# Altium PCB EBC.PcbDoc (part 1 of 2)
Units mil, origin at the board's own origin, x right, y up, seen from the top; angles counter-clockwise.
Board outline 3271.95 x 1972.47 mil, 2 copper layers (Top Layer, Bottom Layer), stack 12.8 mil thick; 145 components, 128 nets, 444 pads, 34 vias.
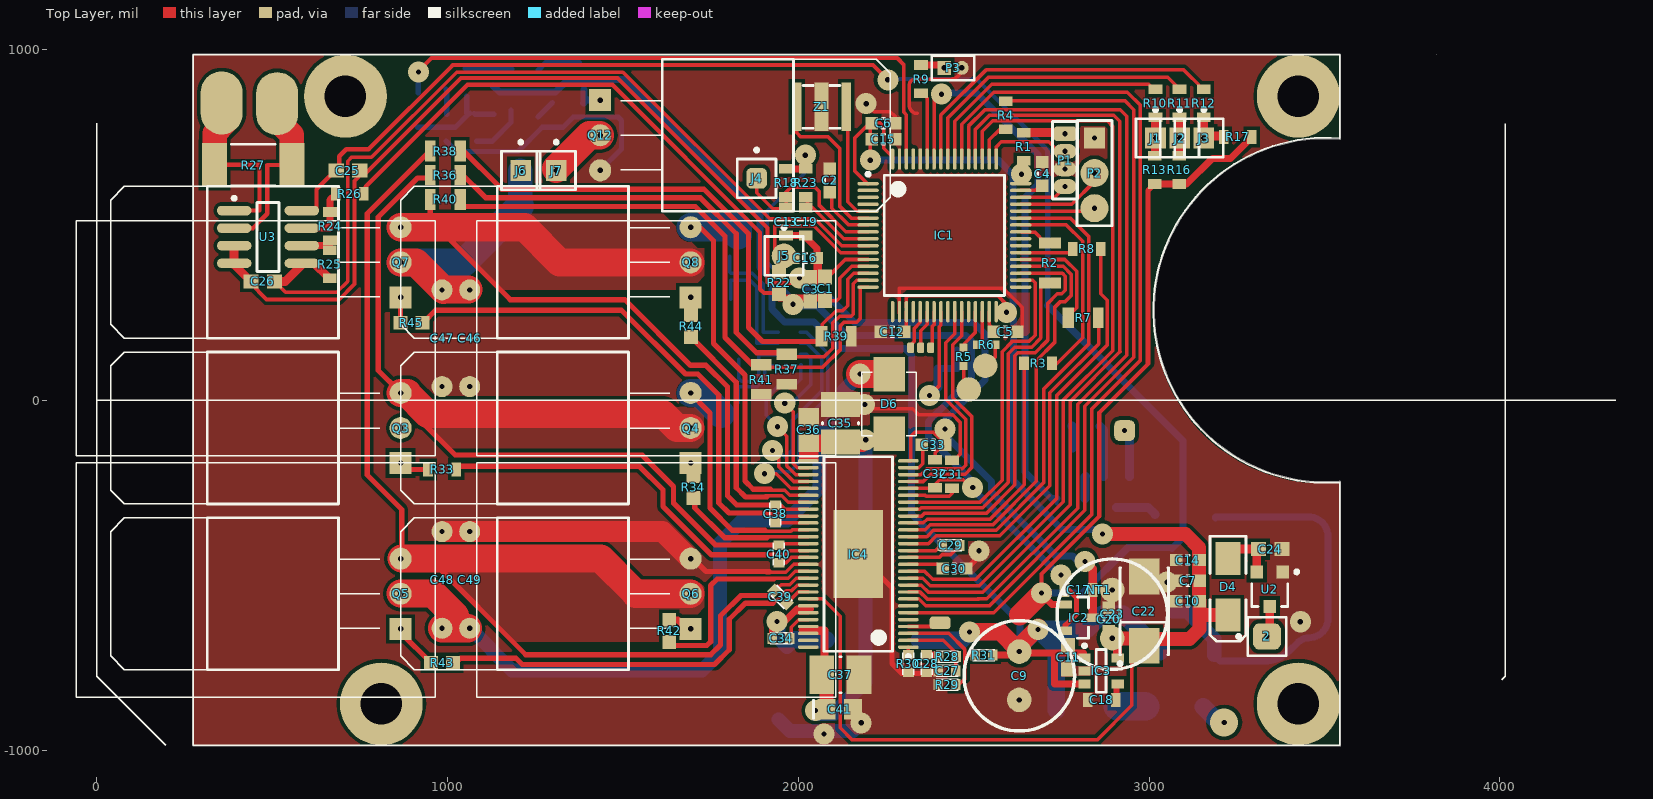
[diagram p0: Top Layer view]
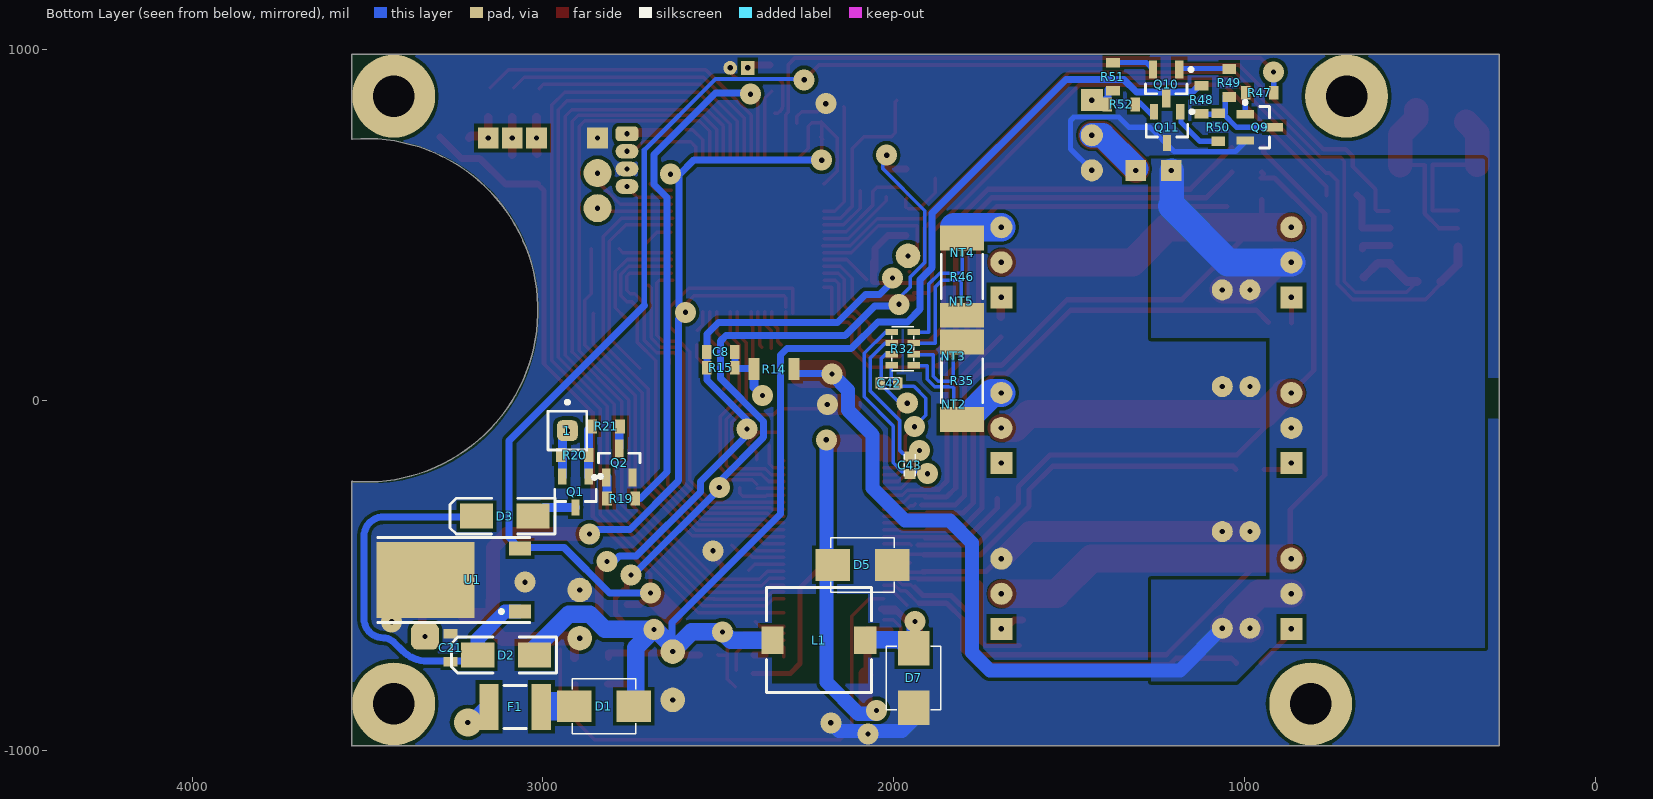
[diagram p1: Bottom Layer view, seen from below]

## Layer stack, top to bottom
Top Solder: solder mask 0.4, Solder Resist, Dk 3.5
Top Layer: signal copper 1.4
Dielectric1: core 10, FR-4, Dk 4.2
Bottom Layer: signal copper 1.4
Bottom Solder: solder mask 0.4, Solder Resist, Dk 3.5

## Board outline
273.61,-984.25 ccw(c275.59,-984.25) 275.59,-986.24 ccw(c275.59,-984.25) 275.59,-986.24 3543.31,-986.24 ccw(c3543.31,-984.25) 3545.29,-984.25 3545.29,-234 ccw(c3543.31,-234) 3542.35,-232.26 ccw(c3541.98,-234.75) 3541.79,-232.24 cw(c3503.94,255.91) 3542.84,743.97 ccw(c3543.04,746.48) 3545.55,746.48 ccw(c3543.04,746.48) 3545.29,747.59 3545.29,984 ccw(c3543.31,984) 3543.31,985.98 276.56,985.98 ccw(c275.59,984.25) 273.61,984.25

## Design rules (kind name [scope] priority, off if disabled: settings)
AssemblyTestPointUsage [All] p1 off:
AssemblyTestpoint [All] p1 off: testpointundercomponent=TRUE minsize=40 maxsize=100 preferedsize=60 minholesize=0 maxholesize=40 preferedholesize=32 testpointgrid=1 usegrid=TRUE gridtolerance=0.01 allowsidetop=TRUE allowsidebottom=TRUE
Clearance Clearance_Phases [InPolygon and InNetClass('Phases')] p1: gap=5 except(7: Arc-Poly Track-Poly SMDPad-Poly THPad-Poly Via-Poly Fill-Poly Poly-Poly)
Clearance "Clearance pads mounting" [(InNet('HOUSING_0') OR InNet('HOUSING_1') OR InNet('HOUSING_2')) AND IsPad] p2: gap=0.1
Clearance "Clearance main" [All] p3: gap=5.12 except(7.09: SMDPad-SMDPad SMDPad-THPad THPad-THPad; 8.27: SMDPad-Via THPad-Via Via-Via; 10.5: Arc-Poly Track-Poly SMDPad-Poly THPad-Poly Via-Poly Fill-Poly Poly-Poly)
ComponentClearance [All] p1 off: gap=10 collisioncheckmode=3 verticalgap=10 showdistances=FALSE
DiffPairsRouting [All] p1: maxlimit=10 minlimit=5 mostfreqgap=5 toplayer_minwidth=6 toplayer_maxwidth=25 toplayer_prefwidth=8 bottomlayer_minwidth=6 bottomlayer_maxwidth=25 bottomlayer_prefwidth=8 maxuncoupledlength=500
FabricationTestPointUsage [All] p1 off: valid=0 allowmultiple=FALSE
FabricationTestpoint [(IsPad And (OnTopLayer Or OnBottomLayer))] p1 off: side=3 testpointundercomponent=TRUE minsize=40 maxsize=100 preferedsize=60 minholesize=0 maxholesize=40 preferedholesize=32 testpointgrid=1 allowsidetop=TRUE allowsidebottom=TRUE usegrid=TRUE gridtolerance=0.01
HoleToHoleClearance [All] p1: gap=5.12 allowstackedmicrovias=TRUE
MinimumSolderMaskSliver [All] p1 off: minsoldermaskwidth=1.97
NetAntennae [All] p1 off: netantennaetolerance=10
PasteMaskExpansion [All] p1 off: expansion=0
PlaneClearance [All] p1: clearance=10
PlaneConnect [All] p1: planeconnectstyle=Direct reliefexpansion=7.87 reliefentries=4 reliefconductorwidth=0 reliefairgap=7.87
PolygonConnect [All] p1: connectstyle=Direct reliefconductorwidth=11.81 reliefentries=4 polygonreliefangle="90 Angle" airgapwidth=11.81
RoutingVias [All] p1: holewidth=11.81 width=60 viastyle="Through Hole" minholewidth=7.87 minwidth=55 maxholewidth=25 maxwidth=100
SilkToSilkClearance [All] p1 off: silktosilkclearance=3.94
SilkToSolderMaskClearance SilkscreenOverComponentPads [IsPad] p1 off: minsilkscreentomaskgap=5.12 clearancetoexposedcopper=TRUE
SolderMaskExpansion [All] p1 off: expansion=7.87
Width [All] p1: maxlimit=236.22 minlimit=10 preferedwidth=10
16 further rules are at their usual default settings.

## Classes and differential pairs
component class CTR1: 1 2 C1 C2 C3 C4 C5 C6 C7 C8 C9 C10 C11 C12 C13 C14 C15 C16 C17 C18 C19 C20 C21 C22 C23 C24 C25 C26 D1 D2 D3 D4 F1 H2.1 HL1 IC1 IC2 IC3 J1 J2 J3 J4 J5 NT1 P1 P2 P3 Q1 Q2 Q? R1 R2 R3 R4 R5 R6 R7 R8 R9 R10 R11 R12 R13 R14 R15 R16 R17 R18 R19 R20 R21 R22 R23 R24 R25 R26 R27 U1 U2 U3 Y1 Z1
component class PWR1: C46 C47 C48 C49 C51 C52 C53 J6 J7 J? NT2 NT3 NT4 NT5 NT6 NT7 NT8 NT9 NT10 NT11 NT12 NT304 NT? Q3 Q4 Q5 Q6 Q7 Q8 Q9 Q10 Q11 Q12 R33 R34 R35 R36 R37 R38 R39 R40 R41 R42 R43 R44 R45 R46 R47 R48 R49 R50 R51 R52 VT?
component class DRV1: C27 C28 C29 C30 C31 C32 C33 C34 C35 C36 C37 C38 C39 C40 C41 C42 C43 D5 D6 D7 IC4 L1 R28 R29 R30 R31 R32
net class Sense: 1_SENSE 2_SENSE AN_IN NetC38_1 NetC42_1 NetC42_2 NetC43_1 NetC43_2 NetNT2_1 NetNT3_1 NetNT4_1 NetNT5_1
net class Stabilizers: _3.3V NetC18_1
net class "FET Drive": _CTRL_GND NetC38_2 NetC39_2 NetC40_2 PHASE_1 PHASE_2 PHASE_3 UH_P UL_N UL_P VH_P VL_P WH_P WL_N WL_P
net class Buck: NetC34_1 NetC34_2 NetIC4_3
net class Control: 1_H_CONTROL 1_L_CONTROL 2_H_CONTROL 2_L_CONTROL NetIC1_34 NetIC4_21 RX SPI_MISO SPI_MOSI SPI_SCK TX

## Components (designator, comment, footprint, x,y, rotation, side; value= is the part's Value field where it differs from the comment)
1 "2S" PIN1#1 2930,-87 r180 bottom
2 "1S" PIN1#2 3336,-674 r90 top
C1 "2.2u" ERA-0603 2076,317 r90 top
C2 "0.1u" CAPC1608X08N(0603) 2089,626 r90 top
C3 "0.1u" ERA-0603 2034,316 r90 top
C4 "2.2u" CAPC1608X08N(0603) 2695.33,644.94 r90 top
C5 "2.2u" CAPC1608X08N(0603) 2590.33,194.94 r0 top
C6 "2.2u" CAPC1608X08N(0603) 2242.33,788.94 r0 top
C7 "2.2u" CAPC1608X08N(0603) 3110.33,-515.06 r180 top
C8 "0.1u" 0603x 2493,137 r0 bottom
C9 "CAP TANT POLY 220UF 6.3V 2312 15mOhm" CAP_POLY_330 2630,-786 r270 top
C10 "0.1u" CAPC1608X08N(0603) 3110.33,-573.06 r180 top
C11 "0.1u" ERA-0603 2768.94,-733.33 r270 top
C12 "0.1u" CAPC1608X08N(0603) 2268,195 r180 top
C13 "0.1u" 0603x 1965,509 r270 top
C14 "0.1u" CAPC1608X08N(0603) 3110.33,-456.06 r180 top
C15 "0.1u" CAPC1608X08N(0603) 2242.33,743.94 r0 top
C16 "0.1u" CAPC1608X08N(0603) 2019,405 r0 top
C17 "0.1u" 0603x 2798.94,-541.33 r0 top
C18 "10nf 50V 10%" 0603x 2865,-855 r180 top
C19 "0.1u" 0603x 2021,509 r270 top
C20 "2.2u" CAPC1608X08N(0603) 2884.94,-625.33 r90 top
C21 "2.2u" 0603x 3263,-706 r90 bottom
C22 "CAP TANT POLY 220UF 6.3V 2312 15mOhm" C 2986,-602 r90 top
C23 "CAP TANT POLY 220UF 6.3V 2312 15mOhm" CAP_POLY_330 2894.94,-610.33 r90 top
C24 "Cap" ERA-0603 3345,-425 r0 top
C25 "Cap" ERA-0603 716,654 r0 top
C26 "Cap" ERA-0603 473,338 r180 top
C27 "120pF 50V 5%" 0402small 2423.94,-772.33 r0 top
C28 "6.8nF 50V 10%" 0402small 2365.94,-751.33 r90 top
C29 "22nF 50V 10%" 0402small 2434.94,-414.33 r180 top
C30 "2.2u 25V 10%" CAPC1608X08N(0603) 2444.94,-480.33 r180 top
C31 "2.2uF 25V" 0603x 2437.94,-211.33 r90 top
C32 "2.2u" 0603x 2389.94,-210.33 r90 top
C33 "2.2u" CAPC1608X08N(0603) 2384.94,-127.33 r0 top
C34 "0.1uF 50V" 0402small 1950.94,-679.33 r0 top
C35 "2.2u 100V" "EIA CC1210" 2119.94,-66.33 r90 top
C36 "0.1u" C0805 2029.94,-85.33 r90 top
C37 "2.2u 100V" "EIA CC1210" 2119.94,-783.33 r0 top
C38 "0.22uF 50V" 0402small 1934.35,-324.8 r270 top
C39 "0.22uF 50V" 0402small 1948.94,-561.33 r315 top
C40 "0.22uF 50V" 0402small 1944.35,-438.91 r270 top
C41 "0.1u" C0805 2117.94,-881.33 r0 top
C42 "1nF 50V" 0402small 2013,48 r180 bottom
C43 "1nF 50V" 0402small 1954,-186 r90 bottom
C46 "1000uF 35V 10%" CAP_1mF_63V 1062.99,176.17 r0 top
C47 "1000uF 35V 10%" CAP_1mF_63V 984.25,176.17 r180 top
C48 "1000uF 35V 10%" CAP_1mF_63V 984.25,-512.81 r180 top
C49 "1000uF 35V 10%" CAP_1mF_63V 1062.99,-512.81 r0 top
D1 "Diode" SMB_real#1 2826,-873 r180 bottom
D2 "Diode" SMA 3105,-727 r0 bottom
D3 "Diode" SMA 3109,-331 r0 bottom
D4 "Diode" SMA 3225,-532 r270 top
D5 "CDBB2100-G" SMB_real#2 2089.2,-470 r0 bottom
D6 "CDBB2100-G" SMB_real#2 2259,-11 r270 top
D7 "CDBB2100-G" SMB_real#2 1942.87,-792.33 r90 bottom
F1 "Fuse 1" 1812 3079,-875 r0 bottom
IC1 "STM32F405" LQFP64_L 2416.32,469.6 r0 top
IC2 "LT1460KCS3-3.3" SOT23-3_L 2799.94,-620.33 r0 top
IC3 "TPS73233DBVT" SOT23-5_L 2862.94,-772.33 r0 top
IC4 "DRV8301DCAR" HTSSOP56(L) 2170.88,-438.91 r180 top
J1 "Socket" PIN1#3 3018,747 r0 top
J2 "Socket" PIN1#3 3087,747 r0 top
J3 "Socket" PIN1#3 3156,747 r0 top
J4 "Socket" PIN1#4 1881,632 r0 top
J5 "Socket" PIN1#5 1959,411 r0 top
J6 "Socket" PIN1#3 1208.63,654.42 r0 top
J7 "Socket" PIN1#3 1309.63,654.42 r0 top
L1 "33u" DR74 2212.94,-684.33 r0 bottom
NT1 "NET_TIE" NET_TIE_10mil 2860.94,-541.33 r180 top net-tie
NT2 "NET_TIE" NET_TIE_10mil 1828,-17 r90 bottom net-tie
NT3 "NET_TIE" NET_TIE_10mil 1830,130 r270 bottom net-tie
NT4 "NET_TIE" NET_TIE_10mil 1805,425 r270 bottom net-tie
NT5 "NET_TIE" NET_TIE_10mil 1807,277 r90 bottom net-tie
P1 "Header 4" MHDR1X4 2760.33,758.94 r270 top
P2 "Header 3" HDR1X3 2844.33,746.94 r270 top
P3 "MHDR1X2" MHDR1X2 2416,947 r0 top
Q1 "IRLML2803" SOT-23_N 2907,-262 r270 bottom
Q2 "2N7002" SOT23_N 2782,-179 r90 bottom
Q3 "IRF3710" TO-220AB_LOW 866.14,-79.74 r90 top
Q4 "IRF3710" TO-220AB_LOW 1692.91,-79.74 r90 top
Q5 "IRF3710" TO-220AB_LOW 866.14,-552.18 r90 top
Q6 "IRF3710" TO-220AB_LOW 1692.91,-552.18 r90 top
Q7 "IRF3710" TO-220AB_LOW 866.14,392.7 r90 top
Q8 "IRF3710" TO-220AB_LOW 1692.91,392.7 r90 top
Q9 "BC847B" SOT23_N 956.25,777.56 r180 bottom
Q10 "BC847B" SOT23_N 1223,901 r270 bottom
Q11 "BC857B" SOT-23A_N 1220.47,777.56 r270 bottom
Q12 "IRF3710" TO-220AB_LOW 1435,755 r270 top
R1 "Res1" 0603x 2642.33,721.94 r270 top
R2 "Res1" 1206x 2717.33,390.94 r90 top
R3 "Res1" 0603x 2683.33,104.94 r0 top
R4 "Res1" 0603x 2591.33,811.94 r270 top
R5 "Res1" 0402x 2471,123 r270 top
R6 "Res1" 0402x 2535,158 r0 top
R7 "Res1" 0805x 2811.33,234.94 r180 top
R8 "Res1" 0603x 2822.33,430.94 r0 top
R9 "Res1" 0603x 2350,915 r90 top
R10 "Res1" 0603x 3018,846 r270 top
R11 "Res1" 0603x 3087,846 r270 top
R12 "Res1" 0603x 3156,846 r270 top
R13 "Res1" 0603x 3016,656 r270 top
R14 "39k, 1%" 1206x 2341,88 r0 bottom
R15 "2.2k, 1%" 0603x 2493,92 r0 bottom
R16 "Res1" 0603x 3086,656 r270 top
R17 "Res1" 0603x 3253,750 r0 top
R18 "10k, 1%" 0603x 1965,619 r270 top
R19 "Res1" 0603x 2777,-281 r180 bottom
R20 "Res1" 0603x 2909,-157 r0 bottom
R21 "Res1" 0603x 2820,-75 r0 bottom
R22 "10k, 1%" RESC1608X05N(0603) 1945,334 r90 top
R23 "10k, 1%" 0603x 2021,619 r270 top
R24 "Res1" 0603x 665,496 r270 top
R25 "Res1" 0603x 664,387 r90 top
R26 "Res1" 0603x 721,588 r0 top
R27 "RES SMD 0.01 OHM 1% 2W 2512" 1T-2512 446,670 r0 top
R28 "15k, 1%" 0402small 2424.94,-731.33 r0 top
R29 "3.3k, 1%" 0402small 2423.94,-811.33 r180 top
R30 "220k, 1%" 0402small 2313.94,-751.33 r270 top
R31 "18k, 1%" 0402small 2529,-727 r180 top
R32 "100R" RES_ARRAY_4X 1974,115 r90 bottom
R33 "4R7" 0603x 984.25,-197.85 r180 top
R34 "4R7" RESC1608X05N(0603) 1701,-248 r90 top
R35 "RES SMD 0.01 OHM 1% 2W 2512" 1T-2512 1804.74,55 r90 bottom
R36 "39k, 1%" 0805x 993.74,641 r0 top
R37 "2.2k, 1%" 0805x 1967,88 r90 top
R38 "39k, 1%" 0805x 993.74,710 r0 top
R39 "2.2k, 1%" 0805x 2108,182 r180 top
R40 "39k, 1%" 0805x 993.74,572 r0 top
R41 "2.2k, 1%" 0805x 1894,59 r90 top
R42 "4R7" RESC1608X05N(0603) 1632,-658 r90 top
R43 "4R7" RESC1608X05N(0603) 984.25,-749.03 r180 top
R44 "4R7" RESC1608X05N(0603) 1694,211 r90 top
R45 "4R7" RESC1608X05N(0603) 897,220.52 r180 top
R46 "RES SMD 0.01 OHM 1% 2W 2512" 1T-2512 1805,352 r270 bottom
R47 "Res1" 0603x 956.25,875.98 r0 bottom
R48 "Res1" 0603x 1122,856 r270 bottom
R49 "Res1" 0603x 1043,904 r270 bottom
R50 "Res1" 0603x 1074.36,777.56 r270 bottom
R51 "Res1" 0603x 1375,922 r90 bottom
R52 "Res1" 0603x 1351,843 r180 bottom
U1 "L7805CT" TO-252AA 3200,-513 r90 bottom
U2 "LM78M05CT" 318-08 3344,-539 r180 top
U3 "MAX9918" SO8_M 488,465 r0 top
Z1 "AWSCR-8.00CV-T" CRYSTAL_CERAMIC 2066,836 r180 top

## Footprints (in the part's own frame and the unit in brackets; to place one, negate y for a bottom-side part, rotate by r counter-clockwise, add the part's x,y. Pads: shape width x height; smd on the part's side, far side on the other; paste and mask are expansions set on the pad)
1T-2512 [mm] "Chip Resistor; Body 6.4 x 3.2 mm (LxW typ)"
  rect 1.8x3.2 smd: 1(-2.8,0) 2(2.8,0)
  silkscreen extent -1.6,-1.5 1.6,1.5
318-08 [mm] "SOT-23; 3 Leads; Body 3.0 x 2.6 mm, inc. leads (LxW max)"
  rect 0.9x0.95 smd: 1(-0.95,-1.25) 2(0.95,-1.25) 3(0,1.25)
  silkscreen extent -2.08,-1.37 1.3,1.25
0402small [mm]
  rect 0.7x0.8 smd: 1(-0.635,0) 2(0.635,0)
  silkscreen extent -0.8,-0.4 0.8,0.4
0402x [mm] "Chip Capacitor, Body 1.0x0.5mm, IPC Medium Density"
  rect 0.6x0.6 smd: 1(-0.66,0) 2(0.66,0)
  body extent -0.5,-0.25 0.5,0.25, height 0.6
0603x [mm] "Chip Resistor; Body 1.6 x 0.8 mm (LxW typ)"
  rect 0.7x1 smd: 1(-1.016,0) 2(1.016,0)
0805x [mil] "Chip Resistor; Body 2 x 1.3 mm (LxW typ)"
  rect 33x59.06 smd: 1(42,0)
  rect 30x59.06 smd: 2(-43,0)
1206x [mm]
  rect 0.8x1.6 smd: 1(-1.45,0) 2(1.45,0)
1812 [mm] "Chip Capacitor, Body 4.5x3.2mm, IPC High Density"
  rect 1.4x3.3 smd: 1(-1.9,0) 2(1.9,0)
  silkscreen extent -0.8,-1.55 0.8,1.55, body extent -2.4,-1.7 2.4,1.7, height 1.4
C [mm] "Capacitor, SM Tantalum; Body 6.0 x 3.2 mm (LxW typ)"
  rect 2.6x2.2 smd: 1(-2.5,0) 2(2.5,0)
  silkscreen extent -3.92,-1.75 3.15,1.87
C0805 [mm] "Chip Capacitor; Body 2.0 x 1.2 mm (LxW typ)"
  rect 1.3x1.5 smd: 1(-0.95,0) 2(0.95,0)
  silkscreen extent -1.9,-0.65 -1.9,0.65
CAP_1mF_63V [mil]
  round 60 hole 15: 1(0,-137.8) 2(0,137.8)
  silkscreen extent 20,-335 1043,335
CAP_POLY_330 [mil]
  round 70 hole 15: 1(-68.9,0) 2(68.9,0)
  silkscreen extent -157,-157 157,157
CAPC1608X08N(0603) [mm] "Chip Capacitor, 2-Leads, Body 1,60x0,80mm, IPC Medium Density"
  rect 0.9x0.9 smd: 1(-0.85,0) 2(0.85,0)
  silkscreen extent -0.1,-0.35 0.1,0.35, body extent -0.8,-0.4 0.8,0.4, height 0.8
CRYSTAL_CERAMIC [mm]
  rect 0.7x3.5 smd: 1(-1.8,0) 3(1.8,0)
  rect 1x3.5 smd: 2(0,0)
  silkscreen extent -1.35,-1.55 1.35,1.55
DR74 [mm] "Precision Wire Wound Inductor, 2-Leads, Body 7,60x7,60mm, IPC High Density"
  rect 1.6x2 smd: 1(-3.35,0) 2(3.35,0)
  silkscreen extent -3.8,-3.8 3.8,3.8, body extent -3.8,-3.8 3.8,3.8, height 4.35
"EIA CC1210" [mm]
  rect 1.8x2.8 smd: 1(-1.35,0) 2(1.35,0)
  silkscreen extent -0.05,-1.3 0.05,1.3, body extent -1.85,-1.4 1.85,1.4, height 2.8
ERA-0603 [mm] "Chip Resistor; Body 1.6 x 0.8 mm (LxW typ)"
  rect 1.1x1 smd: 1(-0.85,0) 2(0.85,0)
HDR1X3 [mil] "Connector; Header; 3 Position"
  rect 59.06x59.06 hole 15: 1(0,0)
  round 80 hole 15: 2(100,0) 3(200,0)
  silkscreen extent -50,-50 250,50
HTSSOP56(L) [mm]
  oval 1.5x0.25 smd: 1(-3.625,6.75) 2(-3.625,6.25) 3(-3.625,5.75) 4(-3.625,5.25) 5(-3.625,4.75) 6(-3.625,4.25) 7(-3.625,3.75) 8(-3.625,3.25) 9(-3.625,2.75) 10(-3.625,2.25) 11(-3.625,1.75) 12(-3.625,1.25) 13(-3.625,0.75) 14(-3.625,0.25) 15(-3.625,-0.25) 16(-3.625,-0.75) 17(-3.625,-1.25) 18(-3.625,-1.75) 19(-3.625,-2.25) 20(-3.625,-2.75) 21(-3.625,-3.25) 22(-3.625,-3.75) 23(-3.625,-4.25) 24(-3.625,-4.75) 25(-3.625,-5.25) 26(-3.625,-5.75) 27(-3.625,-6.25) 28(-3.625,-6.75) 29(3.625,-6.75) 30(3.625,-6.25) 31(3.625,-5.75) 32(3.625,-5.25) 33(3.625,-4.75) 34(3.625,-4.25) 35(3.625,-3.75) 36(3.625,-3.25) 37(3.625,-2.75) 38(3.625,-2.25) 39(3.625,-1.75) 40(3.625,-1.25) 41(3.625,-0.75) 42(3.625,-0.25) 43(3.625,0.25) 44(3.625,0.75) 45(3.625,1.25) 46(3.625,1.75) 47(3.625,2.25) 48(3.625,2.75) 49(3.625,3.25) 50(3.625,3.75) 51(3.625,4.25) 52(3.625,4.75) 53(3.625,5.25) 54(3.625,5.75) 55(3.625,6.25) 56(3.625,6.75)
  rect 3.61x6.35 smd: 57(0,0)
  silkscreen extent -3.75,-7.05 2.47,7.55, body extent -3.1,-7.05 3.1,7.05, height 1.1
LQFP64_L [mm] "Thin QFP, 64-Leads, Body 10x10mm, Pitch 0.5mm, IPC High Density"
  oval 1.55x0.25 smd: 1(-5.525,3.75) 2(-5.525,3.25) 3(-5.525,2.75) 4(-5.525,2.25) 5(-5.525,1.75) 6(-5.525,1.25) 7(-5.525,0.75) 8(-5.525,0.25) 9(-5.525,-0.25) 10(-5.525,-0.75) 11(-5.525,-1.25) 12(-5.525,-1.75) 13(-5.525,-2.25) 14(-5.525,-2.75) 15(-5.525,-3.25) 16(-5.525,-3.75) 33(5.525,-3.75) 34(5.525,-3.25) 35(5.525,-2.75) 36(5.525,-2.25) 37(5.525,-1.75) 38(5.525,-1.25) 39(5.525,-0.75) 40(5.525,-0.25) 41(5.525,0.25) 42(5.525,0.75) 43(5.525,1.25) 44(5.525,1.75) 45(5.525,2.25) 46(5.525,2.75) 47(5.525,3.25) 48(5.525,3.75)
  oval 0.25x1.55 smd: 17(-3.75,-5.525) 18(-3.25,-5.525) 19(-2.75,-5.525) 20(-2.25,-5.525) 21(-1.75,-5.525) 22(-1.25,-5.525) 23(-0.75,-5.525) 24(-0.25,-5.525) 25(0.25,-5.525) 26(0.75,-5.525) 27(1.25,-5.525) 28(1.75,-5.525) 29(2.25,-5.525) 30(2.75,-5.525) 31(3.25,-5.525) 32(3.75,-5.525) 49(3.75,5.525) 50(3.25,5.525) 51(2.75,5.525) 52(2.25,5.525) 53(1.75,5.525) 54(1.25,5.525) 55(0.75,5.525) 56(0.25,5.525) 57(-0.25,5.525) 58(-0.75,5.525) 59(-1.25,5.525) 60(-1.75,5.525) 61(-2.25,5.525) 62(-2.75,5.525) 63(-3.25,5.525) 64(-3.75,5.525)
  silkscreen extent -5.65,-4.35 4.35,4.55, body extent -5,-5 5,5, height 1.6
MHDR1X2 [mm] "Connector; Header; 2 Position"
  rect 1x1 hole 0.381: 1(0,0)
  round 1 hole 0.381: 2(1.27,0)
  silkscreen extent -0.9,-0.9 2.17,0.9
MHDR1X4 [mil] "Connector; Header; 4 Position"
  rrect50% 42x65 hole 15: 1(0,0)
  oval 42x65 hole 15: 2(50,0) 3(100,0) 4(150,0)
  silkscreen extent -35,-35 185,35
NET_TIE_10mil [mil] "Net tie"
  rect 10x10 smd paste+0 mask+0: 1(9.84,0) 2(0,0)
PIN1#1 [mm] "Connector; Plug"
  rrect50% 1.5x1.5 hole 0.381: 1(0,0)
  silkscreen extent -1.4,-1.4 1.4,2.17
PIN1#2 [mm] "Connector; Plug"
  rrect50% 1.905x2.032 hole 0.381: 1(0,0)
  silkscreen extent -1.4,-1.4 1.4,2.17
PIN1#3 [mm] "Connector; Plug"
  rect 1.5x1.5 hole 0.381: 1(0,0)
  silkscreen extent -1.4,-1.4 1.4,2.17
PIN1#4 [mm] "Connector; Plug"
  rrect50% 1.5x1.5 smd: 1(0,0)
  silkscreen extent -1.4,-1.4 1.4,2.17
PIN1#5 [mm] "Connector; Plug"
  round 1.778 hole 0.381: 1(0,0)
  silkscreen extent -1.4,-1.4 1.4,2.17
RES_ARRAY_4X [mm]
  rect 0.45x0.9 smd: 1(-0.4,0.8) 2(-0.4,-0.8) 3(0.4,0.8) 4(0.4,-0.8) 5(1.2,0.8) 6(1.2,-0.8) 7(2,0.8) 8(2,-0.8)
  silkscreen extent -0.8,-0.8 2.4,0.8
RESC1608X05N(0603) [mm] "Chip Resistor, 2-Leads, Body 1,60x0,85mm, IPC Medium Density"
  rect 1x1 smd: 1(-0.8,0) 2(0.8,0)
  body extent -0.85,-0.48 0.85,0.47, height 0.5
SMA [mm] "DO-214-AC/SMA; 2 C-Bend Leads; Body 5 x 2.7 mm, inc. leads (LxW)"
  rect 2.4x1.8 smd: 1(-2.05,0) 2(2.05,0)
  silkscreen extent -3.65,-1.3 3.95,1.3
SMB_real#1 [mm]
  rect 2.5x2.3 smd: 1(2.15,0) 2(-2.15,0)
  silkscreen extent -2.3,-1.97 2.3,1.98
SMB_real#2 [mm]
  rect 2.5x2.3 smd: 1(-2.15,0) 2(2.15,0)
  silkscreen extent -2.3,-1.98 2.3,1.97
SO8_M [mm] "SOIC, 8-Leads, Body 4.9x3.9mm, Pitch 1.27mm, IPC Low Density"
  oval 2.5x0.7 smd: 1(-2.45,1.905) 2(-2.45,0.635) 3(-2.45,-0.635) 4(-2.45,-1.905) 5(2.45,-1.905) 6(2.45,-0.635) 7(2.45,0.635) 8(2.45,1.905)
  silkscreen extent -2.57,-2.5 0.8,2.93, body extent -2,-2.5 2,2.5, height 1.75
SOT23-3_L [mm] "SOT23, 3-Leads, Body 2.9x1.3mm, Pitch 0.95mm, Lead Span 2.3mm, IPC High Density"
  rect 1x0.6 smd: 1(-1,0.95) 2(-1,-0.95) 3(1,0)
  silkscreen extent -1.12,-1.5 0.7,1.92, body extent -0.7,-1.5 0.7,1.5, height 1.2
SOT23-5_L [mm] "SOT23, 5-Leads, Body 2.9x1.6mm, Pitch 0.95mm, Lead Span 2.8mm, IPC High Density"
  rect 0.9x0.65 smd: 1(-1.2,0.95) 2(-1.2,0) 3(-1.2,-0.95) 4(1.2,-0.95) 5(1.2,0.95)
  silkscreen extent -1.32,-1.55 0.35,1.95, body extent -0.9,-1.55 0.9,1.55, height 1.45
SOT23_N [mm] "SOT23, 3-Leads, Body 2.9x1.3mm, Pitch 0.95mm, Lead Span 2.3mm, IPC Medium Density"
  rect 1.3x0.6 smd: 1(-1.05,0.95) 2(-1.05,-0.95) 3(1.05,0)
  silkscreen extent -1.17,-1.5 0.7,1.93, body extent -0.7,-1.5 0.7,1.5, height 1.1
SOT-23_N [mm] "SOT23, 3-Leads, Body 2.9x1.3mm, Pitch 0.95mm, Lead Span 2.3mm, IPC Medium Density"
  rect 1.15x0.6 smd: 1(-1.125,0.95) 2(-1.125,-0.95) 3(1.125,0)
  silkscreen extent -1.25,-1.5 0.7,1.92, body extent -0.7,-1.5 0.7,1.5, height 1.11
SOT-23A_N [mm] "SOT23, 3-Leads, Body 2.9x1.3mm, Pitch 0.95mm, Lead Span 2.3mm, IPC Medium Density"
  rect 1.15x0.6 smd: 1(-1.125,0.95) 2(-1.125,-0.95) 3(1.125,0)
  silkscreen extent -1.25,-1.5 0.7,1.92, body extent -0.7,-1.5 0.7,1.5, height 1.09
TO-220AB_LOW [mm] "TO, Thru-Hole, Vertical, Heatsink Mounted; 3 In-Line Leads; Pitch 2.54 mm"
  rect 1.6x1.6 hole 0.381: 1(-2.54,0)
  round 1.6 hole 0.381: 2(0,0) 3(2.54,0)
  silkscreen extent -5.5,1.5 5.5,21
TO-252AA [mm] "D-PAK/TO-252-AA; 3 Leads (1 Cropped); Body 10.4 (inc. leads) x 6.7 mm (LxW max)"
  rect 1x1.6 smd: 1(-2.285,-3.425) 3(2.285,-3.425)
  rect 5.5x7.1 smd: 4(0,3.425)
  silkscreen extent -3.09,-4.13 3.09,6.88

## Part data
1 2: library part Socket, "Socket"
C1 C2 C3 C4 C5 C6 C7 C8 C10 C11 C12 C13 C14 C15 C16 C17 C18 C19 C20 C21 C27 C28 C29 C30 C31 C32 C33 C34 C35 C36 C37 C38 C39 C40 C41 C42 C43 C46 C47 C48 C49: library part "Ceramic Chip Capacitor"
C9 C22 C23: library part "Tantalum Chip Capacitor"
C24 C25 C26: "Capacitor"
D1 D2 D3 D4: "Default Diode"
D5 D6 D7: library part ES1A...D
F1: "Fuse"
IC1: "STM32 ARM-based 32-bit MCU"
IC2: library part PreciseRef
IC3: library part TPS7xx33
IC4: library part DRV8301
L1: library part DR74
NT1 NT2 NT3 NT4 NT5: library part "Net tie", "Net tie"
P1: "Header, 4-Pin"
P2: "Header, 3-Pin"
P3: "Header, 2-Pin"
Q1 Q3 Q4 Q5 Q6 Q7 Q8 Q12: "HEXFET Power MOSFET"
Q2: "N-channel Enhancement Mode Field-effect Transistor"
Q9 Q10: "NPN General-purpose Transistor"
Q11: "PNP General Purpose Amplifier"
R1 R2 R3 R4 R5 R6 R7 R8 R9 R10 R11 R12 R13 R16 R17 R19 R20 R21 R24 R25 R26 R47 R48 R49 R50 R51 R52: "Resistor"
R14 R15 R18 R22 R23 R27 R28 R29 R30 R31 R33 R34 R35 R36 R37 R38 R39 R40 R41 R42 R43 R44 R45 R46: library part SMD
R32: library part RES_Array_4x, "742C0431000FP"
U1: "Positive Voltage Regulator"
U2: "3-Terminal Positive Voltage Regulators, 3-pin TO-220"
Z1: library part Crystal_smd_with_caps

## Free pads (board coordinates)
  round 236.22 hole 118.11: 0(708.66,866.14) 0(811,-866.14) 0(3425.2,-866.14) 0(3425.2,866.14)
  rrect50% 20x30 smd: 2(2320,149) 2(2348.5,149) 2(2377,149)
  round 70 smd: 2(2486,30) 2(2533,98)
  oval 120x180 smd: 3(356,847) 3(514,845)
  rrect50% 60x35 smd: 4(2404,-635)

## Via types
v1: diameter 60, hole 15, Top Layer to Bottom Layer, 33 vias
v2: diameter 80, hole 15, Top Layer to Bottom Layer, 1 vias

## Nets (pads, with @x,y where several pads share a name; then routed paths per layer and width w, separated by ;. In a path a pad name is that pad's centre, name@x,y a point inside that pad or via, vN(x,y) a via of type N, cw(c..) or ccw(c..) an arc to the next point about the centre after c; other vN are vias at no path point)
1_H_CONTROL: IC1.43 IC4.17 | length 1422.2
  Top Layer w10: IC4.17@2313.6,-389.69 2366.57,-389.69 2384.94,-371.33 2563.67,-371.33 2699,-236 2699,31 2726,58 ; IC1.43@2630.33,518.94 2775.33,518.94 2827.33,466.94 2827.33,158.94 2727.33,58.94
1_L_CONTROL: IC1.36 IC4.18 | length 1215
  Top Layer w10: IC4.18@2313.6,-370.01 2361.26,-370.01 2375.94,-355.33 2547.67,-355.33 ; 2548,-355 2555,-355 2678,-232 2678,111.61 2730.33,163.94 ; IC1.36@2633.84,381.02 2755.25,381.02 2777.33,358.94 2777.33,296.94 2761.33,280.94 2747.33,280.94 2730.33,263.94 2730.33,163.94 ; 2730.33,162.94 2730.33,163.94
1_SENSE: IC1.27 IC4.25 | length 675.5
  Top Layer w10: IC4.25@2313.6,-232.21 2356.05,-232.21 2376.94,-211.33 2475.67,-211.33 2495,-192 2495,-48 2440,7 2440,158 2465.53,183.53 IC1.27@2465.53,252.08
2_H_CONTROL: IC4.19 R3.1 | length 753.7
  Top Layer w10: IC4.19@2313.6,-350.32 2355.94,-350.32 2366.94,-339.33 2547,-339.33 ; 2547,-339 2644,-242 2644,113 2640.33,116.67 2640.33,103.94 R3.1@2644.33,107.94
2_L_CONTROL: IC1.35 IC4.20 | length 1162.7
  Top Layer w10: IC4.20@2313.6,-330.64 2351.63,-330.64 2358.94,-323.33 2535.67,-323.33 2617,-242 2617,126.61 2625.33,134.94 2675.33,134.94 2710.33,169.94 2710.33,274.94 2738.33,302.94 2751.33,302.94 2761.33,312.94 2761.33,352.94 2752.94,361.33 IC1.35@2633.84,361.33
2_SENSE: IC1.26 IC4.26 | length 646.8
  Top Layer w10: IC4.26@2313.6,-212.53 2348.74,-212.53 2365.94,-195.33 2467.67,-195.33 2477,-186 2477,-55 2420,2 2420,163 2445.84,188.84 IC1.26@2445.84,252.08
5V_SWITCH: C25.1 IC2.1 R13.2 R16.2 R17.2 U1.3 U3.8 | length 5986.5
  Top Layer w12: U3.8@590,539 622,539 626,543 626,601 691,666 691,695 711,715 775,715 1015,955 2213,955 v1(2255,913) ; v1(2693,-550) 2693,-496 2858,-331 2858,-36 2997,103 2997,105
  Top Layer w15: 2997,105 2997,597 R13.2@3016,616
  Top Layer w20: v1(2693,-550) 2703,-560 2703,-563 2722.93,-582.93 IC2.1@2760.57,-582.93 ; R13.2@3016,616 R16.2@3086,616 3107,616 3180,689 3232,689 R17.2@3293,750
  Top Layer w60: 2630,-613 v1(2693,-550)
  Bottom Layer w12: v1(2255,913) 2257,915 2508,915 2711,712 2713,710
  Bottom Layer w15: 2711,270 2711,712
  Bottom Layer w20: v1(2693,-550) 2810,-550 2939,-421 U1.3@3065,-421 ; 2711,270 3096,-115 3096,-392.2 U1.3@3065.16,-423.04
_3.3V: C6.1 C7.1 C10.1 C12.1 C14.1 C15.1 C20.1 C22.1 C23.1 D4.2 IC1.1 IC1.19 IC1.32 IC1.48 IC1.64 IC3.5 IC4.49 R1.2 | length 4971.2
  Top Layer w10: IC4.49@2028.16,-566.86 2069.46,-566.86 2118.94,-616.33 2118.94,-933.94 2154,-969 2852,-969 2951,-870 C22.1@2951,-710 ; IC1.1@2198.8,617.24 2196.03,617.24 2161.33,651.94 2161.33,747.94 C6.1@2204.33,790.94 ; C15.1@2202.33,742.94 2204.33,744.94 C6.1@2204.33,790.94 ; v1(2205.33,683.94) 2205.33,746.94 C15.1@2208.33,749.94 ; C6.1@2206.33,792.94 C6.1@2204.33,790.94 ; IC1.64@2268.68,687.12 2268.68,692.59 2243.33,717.94 2243.33,780.94 2233.33,790.94 C6.1@2204.33,790.94 ; IC1.19@2308,264 2308,292 2314,298 2568,298 2593.47,272.53 v1(2593.47,250.08) ; C12.1@2308.05,188 IC1.19@2308.05,252.08
  Top Layer w25: C23.1@2892.83,-679.23 2910.18,-696.58 IC3.5@2910.18,-734.93
  Top Layer w40: v1(2867,-382) 3103.27,-382 3142.33,-421.06 C10.1@3142.33,-573.06 ; C23.1@2887.94,-679.23 2892.83,-679.23 C23.1@2894.94,-679.23 C22.1@3010.94,-679.23 ; C22.1@2981,-681 3115,-681 3143.79,-652.21 C10.1@3143.79,-573.06 ; 3146,-612 3146.71,-612.71 D4.2@3225,-612.71
  Bottom Layer w20: v1@2206,685 2569,685 2612,642 2612,268.61 v1(2593.47,250.08) 2613,230.55 2613,-230 2752,-369 2850,-369 2862,-381 v1@2862,-402
  other v1: 2636.33,643.94
_AGND: C1.2 C3.2 C8.2 C13.2 C16.2 C17.2 C19.2 C25.2 C26.2 C32.2 C33.2 IC1.12 IC2.3 IC4.28 NT1.1 R15.2 U3.3 U3.4 | length 4762.6
  Top Layer w10: IC4.28@2313.6,-173.16 2320.94,-173.16 2320.94,-103.33 2331.94,-92.33 2384.94,-92.33 C33.2@2415.44,-122.83 ; C32.2@2389.94,-170.33 2389.94,-150.33 C33.2@2415.67,-124.6
  Top Layer w11: C26.2@436.27,334.73 484,287 691,287 735,331 735,625 757,647 767,647 1038,918 1484,918 1912,490 1912,335 1913,334 2053,334 C1.2@2057,338 ; C1.2@2077,344 2133.7,400.7 IC1.12@2198.8,400.7
  Top Layer w20: C13.2@1965,469 2016,469 2053,432 C3.2@2053,370 ; C1.2@2057,338 C16.2@2057,395
  Top Layer w25: U3.3@391,436 391,386.54 C26.2@439.54,338 ; IC2.3@2839.31,-620.33 2839.31,-481.31
  Bottom Layer w20: v1@1994,360 v1@2006,348 ; v1(2003,348) 2003,338 2040,301 2080,301 2160,221 2499,221 2532,188 2532,57 v1@2418.4,-56.6 ; v1(2418.4,-82.87) 2418.4,-99.4 2551,-232 2551,-262 2733,-444 2782,-444 v1@2806,-468
  other v1: 2817,-460
_CTRL_GND: C2.2 C4.2 C5.2 C6.2 C7.2 C9.2 C10.2 C11.2 C12.2 C14.2 C15.2 C18.2 C20.2 C21.2 C22.2 C23.2 C24.2 C27.1 C28.1 C30.1 C31.2 C35.2 C36.2 C37.2 C41.2 C46.1 C47.2 C48.1 C49.2 D5.1 D7.1 IC1.18 IC1.60 IC1.63 IC3.2 IC4.7 IC4.44 IC4.57 NT1.2 NT3.2 NT5.2 P1.3 P2.1 P3.2 Q2.2 Q6.3 Q9.2 Q11.3 Q12.3 R29.2 R30.2 R35.2 R37.2 R39.2 R41.2 R46.2 U1.4 U2.1 Z1.2 | length 3999.8
  Top Layer w10: 1915.31,-491.33 1963.94,-491.33 1986.83,-468.43 IC4.44@2028.16,-468.43 ; IC4.57@2139.94,-468.43 IC4.57@2139.94,-465.33 ; v1@2183,-25.33 2326,-25.33 2342.67,-42 2440,-42 2461,-63 2461,-154 C31.2@2440,-175 ; v1(2193.33,844.94) 2216.33,821.94 2262.33,821.94 2275.8,808.47 C6.2@2275.8,788.94 ; IC1.18@2288.33,247.94 2288.33,319 2584.27,319 2638.33,264.94 2638.33,209.47 C5.2@2623.8,194.94 ; 2339.49,817 cw(c2339.49,840.49) 2316,840.49 2316,897 cw(c2334,897) 2334,915 2434,915 ccw(c2434,947) P3.2@2466,947
  Top Layer w15: Q6.3@1703,-455 1737,-489 1910,-489 ; 1910,-489.33 1917.94,-489.33 ; IC4.57@2170.88,-438.91 2266.94,-534.96 2266.94,-751.33 2294.94,-779.33 C27.1@2400.94,-779.33 ; C30.1@2488.4,-482.33 2488.4,-472.87 v1@2504.94,-456.33
  Top Layer w60: C48.1@984.25,-375.02 C49.2@1062.99,-375.02 1613.02,-375.02 Q6.3@1690,-452 ; Q6.3@1692.91,-453.76 Q6.3@1692.91,-452.18 Q6.3@1692.91,-452 ; C35.2@2119.94,-13.18 2189.02,-13.18 v1(2189.2,-13)
  Bottom Layer w15: Q9.2@995.62,738.19 1025.15,708.66 ; 1027,708.66 1200.79,708.66 1269.68,777.56 1328.74,777.56 1358.27,807.09 1486.22,807.09 1496.06,797.24 1496.06,716.06 Q12.3@1435,655
  Bottom Layer w40: D7.1@1942.87,-910.44 1976.43,-944 2155.37,-944 v1(2179.09,-920.28)
  other v1: 2073,-952 3431,-632 3050.94,-519.33 2515,-430